# Altium PCB CE_BJTInfineonSOT343_v1.PcbDoc
Units mm, origin at the board's own origin, x right, y up, seen from the top; angles counter-clockwise.
Board outline 59.82 x 12.19 mm, 2 copper layers (Top Layer, Bottom Layer); 25 components, 10 nets, 54 pads, 0 vias.
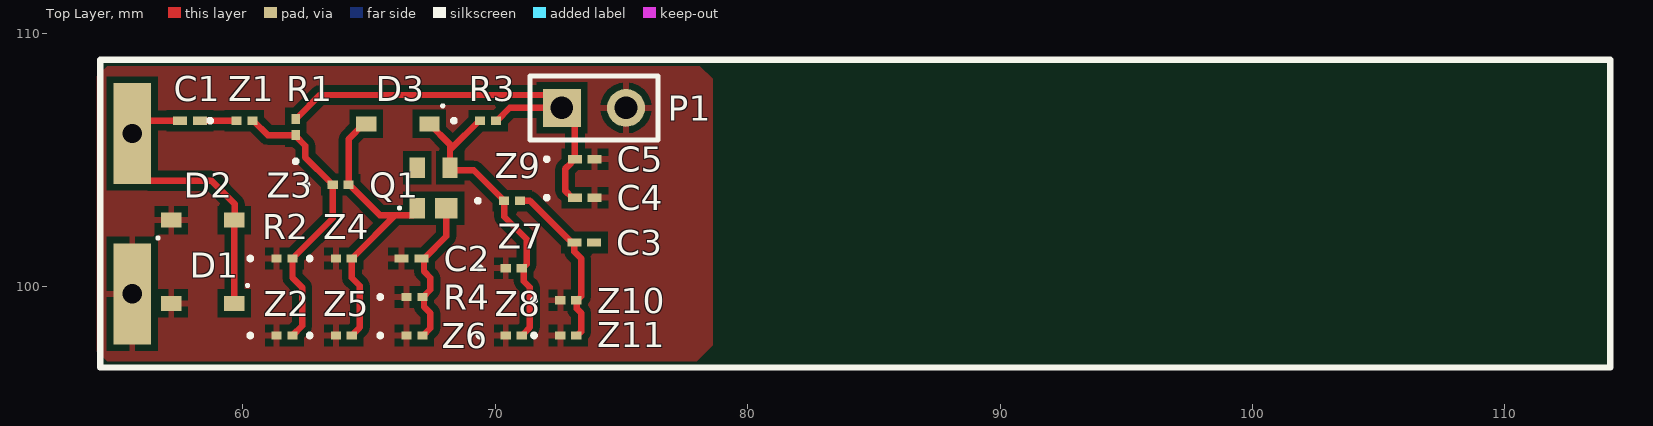
[diagram p0: Top Layer view]
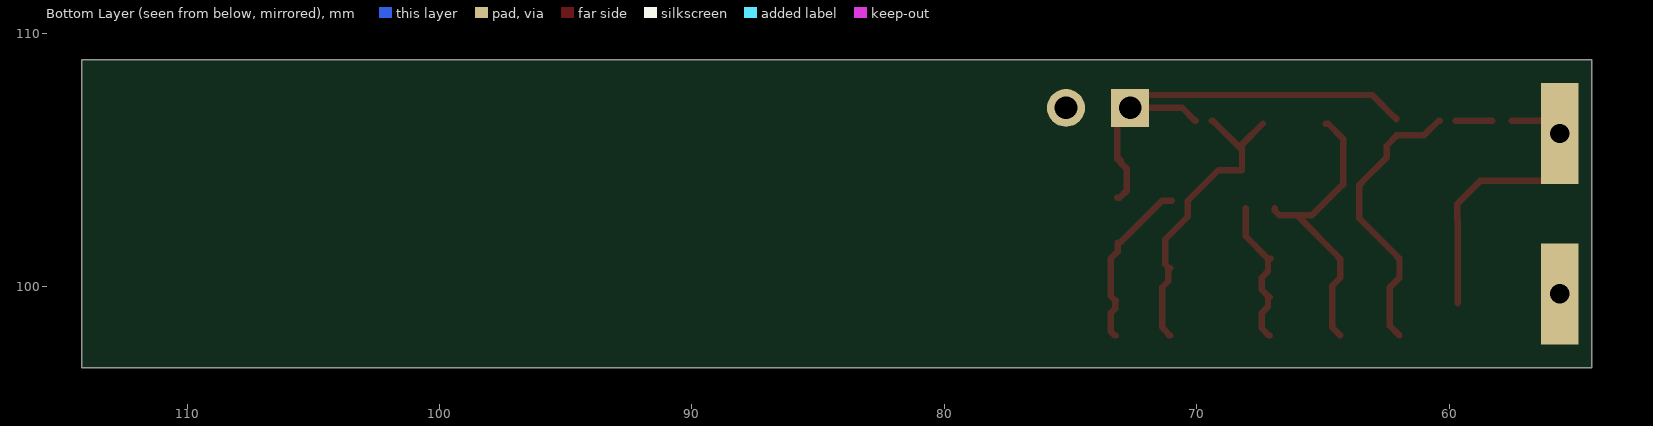
[diagram p1: Bottom Layer view, seen from below]

## Layer stack, top to bottom
Top Solder: solder mask 0.0102, Solder Resist, Dk 3.5
Top Layer: signal copper 0.0356
Dielectric 1: dielectric 0.32, FR-4, Dk 4.8
Bottom Layer: signal copper 0.0356
Bottom Solder: solder mask 0.0102, Solder Resist, Dk 3.5

## Board outline
54.356,96.774 114.173,96.774 114.173,108.966 54.356,108.966

## Design rules (kind name [scope] priority, off if disabled: settings)
Clearance [All] p1: gap=0.254 ignorepadtopadclearanceinfootprint=FALSE except(0: Arc-Hole Track-Hole SMDPad-Hole THPad-Hole Via-Hole Fill-Hole Poly-Hole Region-Hole Text-Hole)
PolygonConnect [All] p1: connectstyle=Relief reliefconductorwidth=0.254 reliefentries=4 polygonreliefangle="90 Angle" airgapwidth=0.254
RoomDefinition CE_BJTInfineonSOT343_v1 [InComponentClass('CE_BJTInfineonSOT343_v1')] p1: confinementstyle=ConfineIn formatcopy=TRUE lockcomponents=FALSE outline 118.11,95.504 124.079,95.504 124.079,104.013 118.11,104.013
RoutingVias [All] p1: holewidth=0.711 width=1.27 viastyle="Through Hole" minholewidth=0.711 minwidth=1.27 maxholewidth=0.711 maxwidth=1.27
SolderMaskExpansion [All] p1: expansion=0.102
Width [All] p1: maxlimit=0.254 minlimit=0.254 preferedwidth=0.254
30 further rules are at their usual default settings.

## Components (designator, comment, footprint, x,y, rotation, side; value= is the part's Value field where it differs from the comment)
C1 "Cin" C0201 57.912,106.553 r0 top value=Value
C2 "" C0201 66.685,101.092 r0 top value=Value
C3 "" C0201 73.533,101.727 r0 top value=Value
C4 "" CAP_CBR_0201 73.553,103.505 r0 top value=Value
C5 "" CAP_CBR_0201 73.553,105.029 r0 top value=Value
D1 "" INF-SOD323_V 58.42,99.314 r270 top
D2 "" INF-SOD323_V 58.42,102.616 r90 top
D3 "" INF-SOD323_V 66.147,106.426 r270 top
P1 "Header 2" HDR1X2 72.644,107.061 r0 top
Q1 "SOT343" INF-SOT343_V 67.564,103.886 r90 top
R1 "" RES_RC0201_P6XP3 62.103,106.299 r90 top value=Value
R2 "" RES_RC0201_P6XP3 61.657,101.092 r0 top value=Value
R3 "" RES_RC0201_P6XP3 69.723,106.553 r0 top value=Value
R4 "" RES_RC0201_P6XP3 66.802,99.568 r0 top value=Value
Z1 "" RES_RC0201_P6XP3 60.071,106.553 r0 top value=Value
Z2 "" RES_RC0201_P6XP3 61.657,98.044 r0 top value=Value
Z3 "" RES_RC0201_P6XP3 63.881,104.013 r0 top value=Value
Z4 "" RES_RC0201_P6XP3 64.008,101.092 r0 top value=Value
Z5 "" RES_RC0201_P6XP3 64.008,98.044 r0 top value=Value
Z6 "" RES_RC0201_P6XP3 66.802,98.044 r0 top value=Value
Z7 "" RES_RC0201_P6XP3 70.739,100.711 r0 top value=Value
Z8 "" RES_RC0201_P6XP3 70.739,98.044 r0 top value=Value
Z9 "" RES_RC0201_P6XP3 70.674,103.378 r0 top value=Value
Z10 "" RES_RC0201_P6XP3 72.898,99.441 r0 top value=Value
Z11 "" RES_RC0201_P6XP3 72.898,98.044 r0 top value=Value

## Footprints (in the part's own frame and the unit in brackets; to place one, negate y for a bottom-side part, rotate by r counter-clockwise, add the part's x,y. Pads: shape width x height; smd on the part's side, far side on the other; paste and mask are expansions set on the pad)
C0201 [mil]
  rect 21.78x13 smd paste+0 mask+0: 1(-15.39,0) 2(15.39,0)
  body extent 0,0 10,10, height 10
CAP_CBR_0201 [mil]
  rect 21.78x13 smd paste+0 mask+0: 1(-15.39,0) 2(15.39,0)
  silkscreen extent -62,-3 -56,3, body extent 0,0 10,10, height 10
HDR1X2 [mm] "Connector; Header; 2 Position"
  rect 1.5x1.5 hole 0.9: 1(0,0)
  round 1.5 hole 0.9: 2(2.54,0)
  silkscreen extent -1.27,-1.27 3.81,1.27
INF-SOD323_V [mm] "SOD, 2-Leads, Body 1.7x1.25 mm"
  rect 0.6x0.8 smd: 1(0,1.25) 2(0,-1.25)
  silkscreen extent -0.76,1.73 -0.66,1.83, body extent -0.63,-0.85 0.63,0.85, height 1.1
INF-SOT343_V [mm] "SOT343, 4-Leads, Body 2x1.25 mm"
  rect 0.8x0.6 smd: 1(-0.8,0.65) 3(0.8,-0.65) 4(0.8,0.65)
  rect 0.8x0.9 smd: 2(-0.8,-0.5)
  silkscreen extent -0.85,1.3 -0.75,1.4, body extent -0.63,-1 0.63,1, height 1
RES_RC0201_P6XP3 [mil]
  rect 15.87x13 smd paste+0 mask+0: 1(-12.44,0) 2(12.44,0)
  silkscreen extent -56,-3 -50,3, body extent 0,0 10,10, height 10

## Part data
C1 C2 C3: library part C0201C270J3GACTU, "No Description Available", Built_By=EMA_UL_Team, Copyright="Copyright (C) 2018 Accelerated Designs. All rights reserved", Manufacturer_Part_Number=C0201C270J3GACTU, RefDes=RefDes, Type=DEV, Vendor=Kemet
C4 C5: library part CBR02C399C3GAC, "No Description Available", Built_By=EMA_UL_Team, Copyright="Copyright (C) 2018 Accelerated Designs. All rights reserved", Manufacturer_Part_Number=CBR02C399C3GAC, RefDes=RefDes, Type=DEV, Vendor=KEMET
D1 D2 D3: library part BAT15-03W, "Single Silicon Schottky Diode, 110 mA IF Max, SOD32, Green", Manufacturer=Infineon, Supplier Part Number 1=N/A, ComponentLink1Description="Manufacturer URL", ComponentLink1URL=http://www.infineon.com/, ComponentLink2Description=Datasheet, ComponentLink2URL=http://www.infineon.com/dgdl/bat15series.pdf?folderId=db3a304314dca3890114ff6812070b44&fileId=db3a304314dca3890114ff6b74ca0b48&location=en.Products.RF.RF_Mixer___Detector_Schottky_Diodes.DATASHEET.bat15series.pdf, ComponentLink3Description="Package Specification", ComponentLink3URL=http://www.infineon.com/dgdl/SOD323-Package_Overview.pdf?folderId=db3a30431936bc4b011952aab84f3bbe&fileId=db3a30431936bc4b011952beed653be3, Configuration=Single, CT (typ)="0.26 pF", DatasheetVersion=Jun-2011, Green=yes, Group="RF Mixer", IF (max)="110 mA", Mounting Technology="Surface Mount", PackageDescription="2-Pin Small Outline Diode Package, 1.25 x 1.7 mm Body", PackageReference=SOD323, PartNumber=BAT15-03W, Supplier 1=Mouser, VF (typ)="0.23 V", VR (max)="4 V"
P1: "Header, 2-Pin", LatestRevisionDate=17-Jul-2002, LatestRevisionNote="Re-released for DXP Platform.", Publisher="Altium Limited"
Q1: library part BFP840ESD, "Robust Low Noise Silicon Germanium Bipolar RF Transistor, 2.25 V VCEO, 35 mA IC, 33.5 dB Gmax, SOT343, Green", Manufacturer=Infineon, ComponentLink1Description="Manufacturer URL", ComponentLink1URL=http://www.infineon.com/, ComponentLink2Description=Datasheet, ComponentLink2URL=http://www.infineon.com/dgdl/Infineon_Robust_WiFi_SiGe_LNA_BFP840ESD_Rev1_1.pdf?folderId=db3a30431f848401011fcbf2ab4c04c4&fileId=db3a304336ca04c90136e88a4d5f35b7&location=en.Products.RF.RF_Transistors_.Ultra_Low_Noise_SiGe_C_Transistors_for_use_up_to_12_GHz.DATASHEET.Infineon_Robust_WiFi_SiGe_LNA_BFP840ESD_Rev1_1.pdf, ComponentLink3Description="Package Specification", ComponentLink3URL=http://www.infineon.com/dgdl/SOT343-Package_Overview.pdf?folderId=db3a30431936bc4b0119535155343cba&fileId=db3a30431936bc4b0119535a9f393cd3, DatasheetVersion="Rev. 1.1", Gmax (typ)="33.5 dB", Green=yes, Group="Robust ultra low noise SiGe", Halogen-free=yes, IC (max)="35 mA", Mounting Technology="Surface Mount", NFmin (typ)="0.6 dB", PackageDescription="4-Pin Small Outline Transistor Package, 1.25 x 2 mm Body", PackageReference=SOT343, PartNumber=BFP840ESD, Ptot (max)="75.0 mW", VCEO (max)="2.25 V"
R1 R2 R3 R4 Z1 Z2 Z3 Z4 Z5 Z6 Z7 Z8 Z9 Z10 Z11: library part RC0201FR-0718KL, "No Description Available", Built_By=EMA_Anthony, Copyright="Copyright (C) 2018 Accelerated Designs. All rights reserved", Manufacturer_Part_Number=RC0201FR-0718KL, RefDes=RefDes, Type=DEV, Vendor=Yageo

## Free pads (board coordinates)
  rect 1.5x4 hole 0.762: 1(55.626,106.045) 2(55.626,99.695)

## Nets (pads, with @x,y where several pads share a name; then routed paths per layer and width w, separated by ;. In a path a pad name is that pad's centre, name@x,y a point inside that pad or via, vN(x,y) a via of type N, cw(c..) or ccw(c..) an arc to the next point about the centre after c; other vN are vias at no path point)
B: D3.2 Q1.1 Z3.2 Z4.2 Z5.2 | length 11.9
  Top Layer w0.254: Z5.2 64.643,98.363 64.643,100.011 64.324,100.33 Z4.2 64.36,101.092 64.398,101.13 64.398,101.167 66.045,102.813 ; D3.2 64.797,106.426 64.197,105.826 Z3.2 64.233,104.013 65.433,102.813 66.045,102.813 ; Q1.1 66.914,102.986 66.741,102.813 66.045,102.813
C: D3.1 Q1.3 R3.1 Z7.2 Z8.2 Z9.1 | length 12.5
  Top Layer w0.254: D3.1 68.214,105.609 Q1.3 68.214,104.586 69.15,104.586 Z9.1 70.358,102.743 71.247,101.854 71.247,100.867 Z7.2@71.091,100.711 ; 68.285,105.467 69.371,106.553 R3.1 ; Z8.2 71.091,98.044 71.129,98.082 71.129,98.119 71.374,98.363 71.374,99.949 71.13,100.193 71.13,100.673 Z7.2@71.091,100.711 ; Z7.2 Z7.2@71.091,100.711
E: C2.2 Q1.2 R4.2 Z6.2 | length 6.1
  Top Layer w0.254: C2.2 C2.2@67.145,101.092 ; Z6.2 67.154,98.044 67.437,98.327 67.437,98.933 67.183,99.187 67.183,99.53 R4.2@67.145,99.568 ; R4.2 R4.2@67.145,99.568 ; Q1.2 68.064,101.969 67.187,101.092 C2.2@67.145,101.092 ; R4.2@67.145,99.568 67.154,99.568 67.437,99.851 67.437,100.33 67.183,100.584 67.183,101.054 C2.2@67.145,101.092
GND: C2.1 C4.2 C5.2 D1.2 D2.1 P1.2 pad.2 R2.1 R4.1 Z2.1 Z4.1 Z5.1 Z6.1 Z7.1 Z8.1 Z10.1 Z11.1
N1: C1.2 Z1.1 | length 1.5
  Top Layer w0.254: C1.2 Z1.1
N2: R1.1 R2.2 Z1.2 Z2.2 Z3.1 | length 11.5
  Top Layer w0.254: Z1.2 60.423,106.553 60.993,105.983 R1.1 62.103,105.947 62.484,105.566 62.484,105.094 63.491,104.088 63.491,104.051 63.529,104.013 Z3.1 63.565,102.684 62.047,101.167 62.047,101.13 62.009,101.092 R2.2 61.973,100.33 62.357,99.946 62.357,98.428 Z2.2
N3: C3.1 Z9.2 Z10.2 Z11.2 | length 6.9
  Top Layer w0.254: Z9.2 71.38,103.378 73.031,101.727 C3.1 73.142,101.356 73.406,101.092 73.406,99.597 Z10.2@73.25,99.441 ; Z11.2 73.25,98.044 73.406,98.2 73.406,98.933 73.241,99.098 73.241,99.441 Z10.2
Vcc: C4.1 C5.1 P1.1 R1.2 R3.2 | length 18.2
  Top Layer w0.254: R1.2 62.103,106.651 62.141,106.69 62.178,106.69 63.057,107.569 72.136,107.569 P1.1 ; R3.2 70.075,106.553 70.583,107.061 P1.1 ; C4.1 73.05,103.505 72.771,103.784 72.771,104.638 73.012,104.879 73.012,104.991 73.05,105.029 C5.1 73.162,106.543 P1.1
Vin: C1.1 D1.1 D2.2 pad.1 | length 12
  Top Layer w0.254: C1.1 56.134,106.553 pad.1 55.626,104.795 56.249,104.172 58.769,104.172 59.69,103.251 59.69,102.636 D2.2 D1.1
Vout: C3.2
pads on no net: Q1.4

## Polygon pours and split planes (outlines as drawn)
GND on Top Layer "Top Layer-GND" (solid, remove dead copper, pour order 2): 54.628,108.712 78.105,108.712 78.613,108.204 78.613,97.663 77.978,97.028 54.628,97.028 54.229,97.427 54.229,108.313

## Silkscreen, mask and mechanical layers (free items; w line width, h text height)
Top Overlay:
  lines w0.254: 54.356,96.774 54.356,97.631 54.356,108.966 114.173,108.966 114.173,96.774 113.792,96.774 55.499,96.774 54.356,96.774